# EAGLE schematic Precision Charlieplex (EAGLE 5.11)
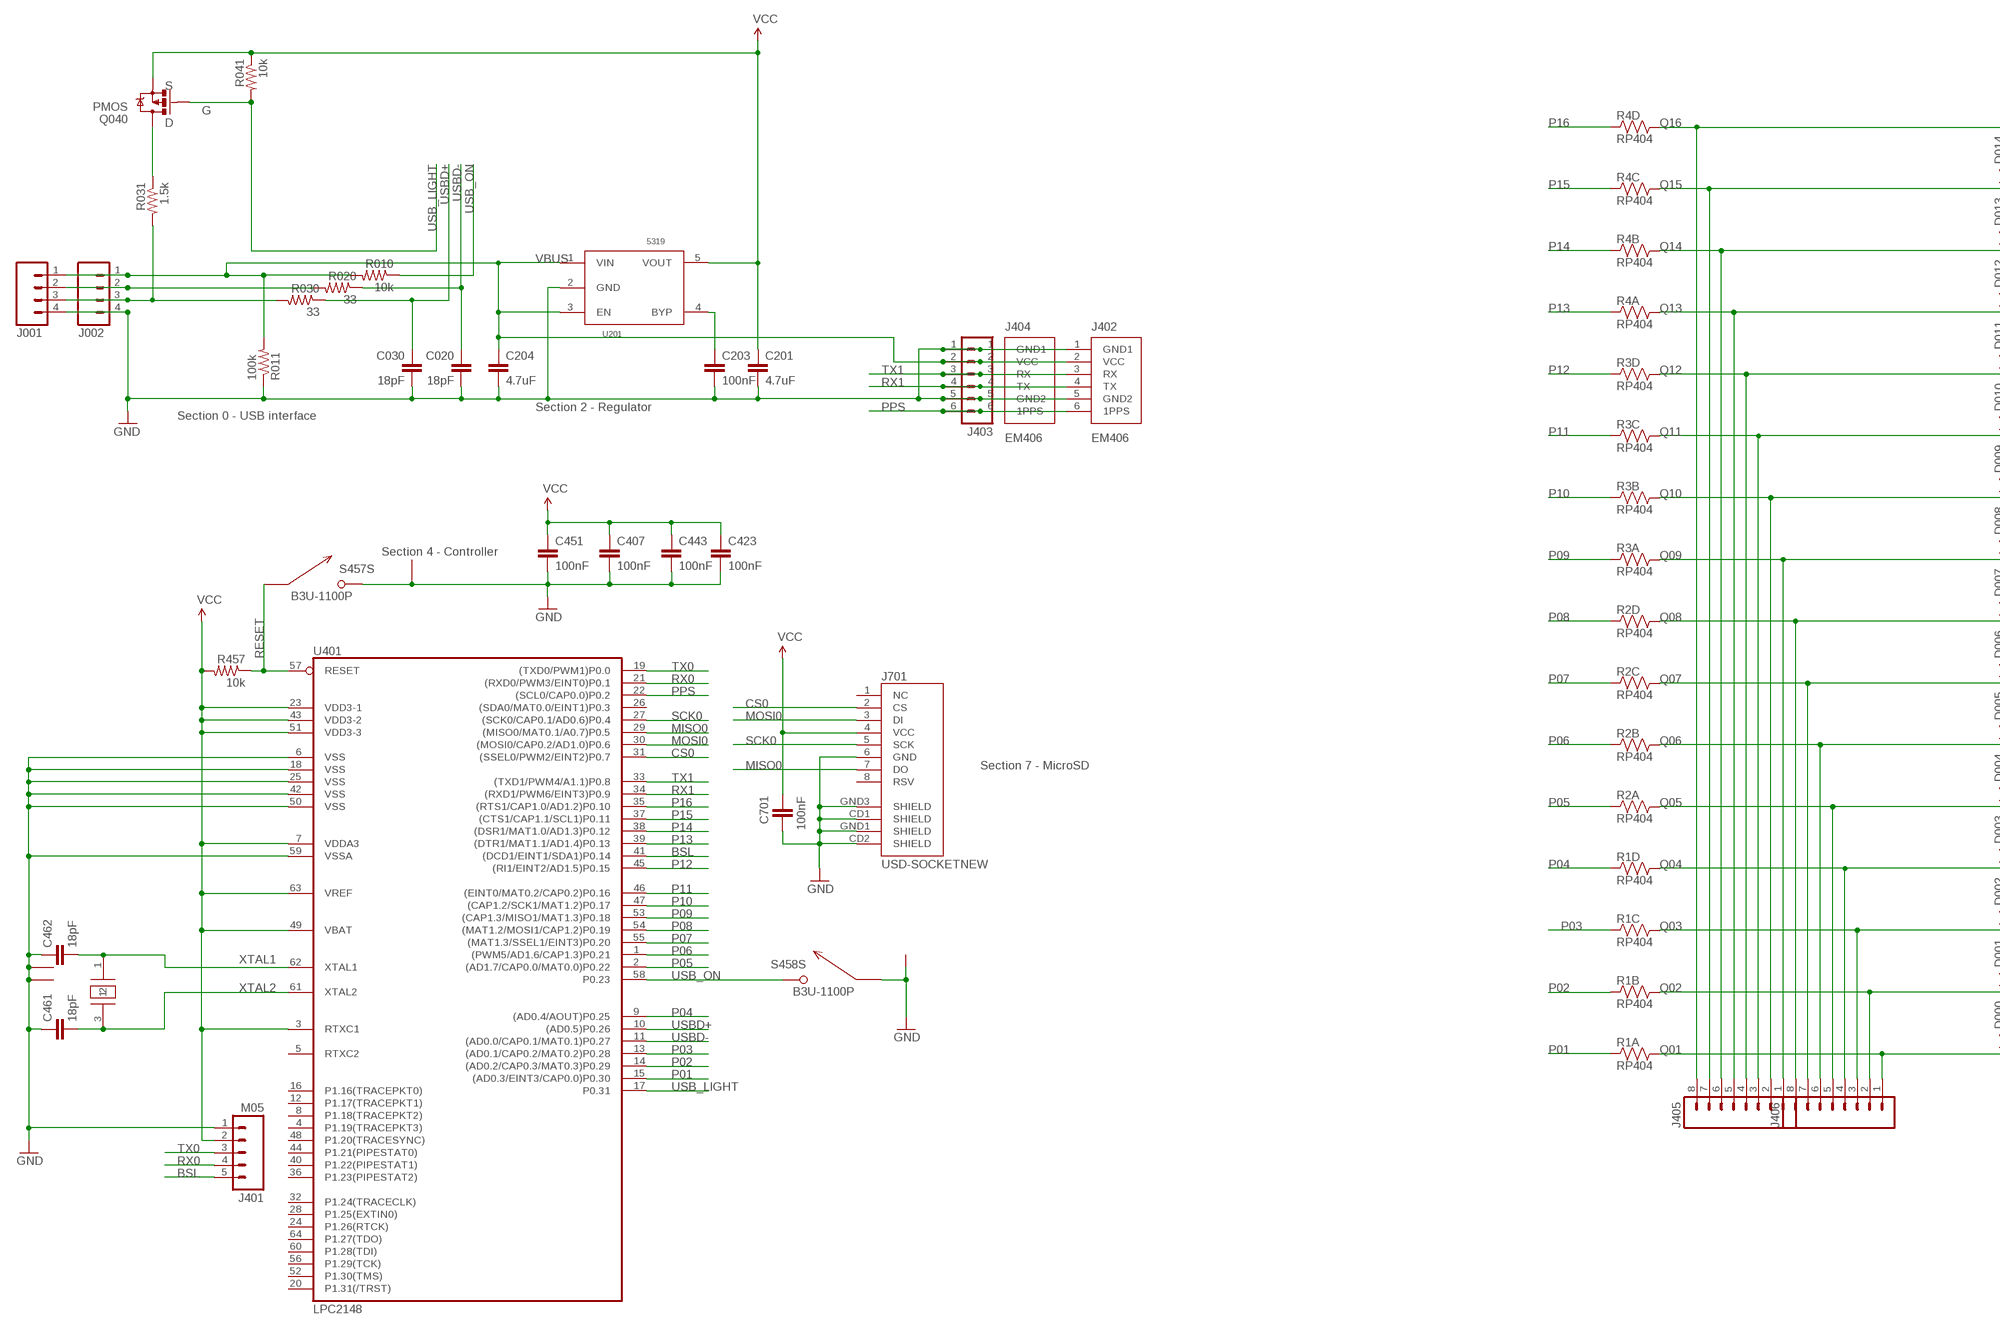
[diagram p0: schematic, sheet 1, part 1 of 2]
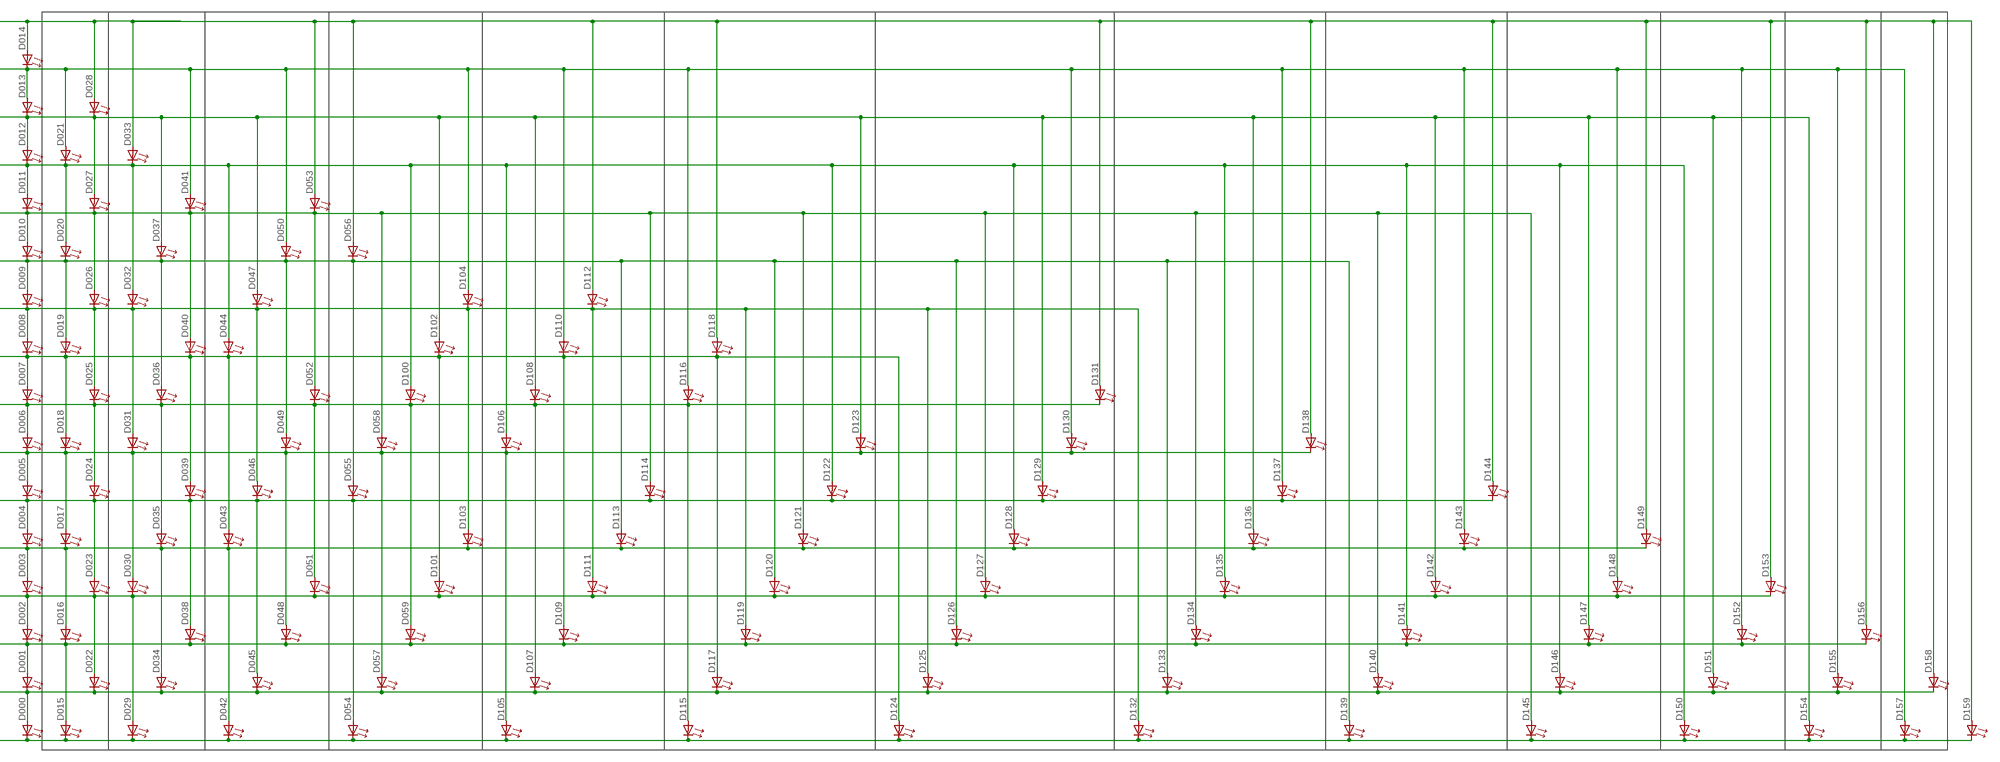
[diagram p1: schematic, sheet 1, part 2 of 2]

## Parts
C020  18pF  CAP0402-CAP  [0402-CAP]
C030  18pF  CAP0402-CAP  [0402-CAP]
C201  4.7uF  CAP0402-CAP  [0402-CAP]
C203  100nF  CAP0402-CAP  [0402-CAP]
C204  4.7uF  CAP0402-CAP  [0402-CAP]
C407  100nF  CAP0402-CAP  [0402-CAP]
C423  100nF  CAP0402-CAP  [0402-CAP]
C443  100nF  CAP0402-CAP  [0402-CAP]
C451  100nF  CAP0402-CAP  [0402-CAP]
C461  18pF  CAP0402-CAP  [0402-CAP]
C462  18pF  CAP0402-CAP  [0402-CAP]
C701  100nF  CAP0402-CAP  [0402-CAP]
D000  HOUR  LED0603_SIDE  [LED0603_SIDE]
D001  HOUR  LED0603_SIDE  [LED0603_SIDE]
D002  HOUR  LED0603_SIDE  [LED0603_SIDE]
D003  HOUR  LED0603_SIDE  [LED0603_SIDE]
D004  HOUR  LED0603_SIDE  [LED0603_SIDE]
D005  HOUR  LED0603_SIDE  [LED0603_SIDE]
D006  HOUR  LED0603_SIDE  [LED0603_SIDE]
D007  HOUR  LED0603_SIDE  [LED0603_SIDE]
D008  HOUR  LED0603_SIDE  [LED0603_SIDE]
D009  HOUR  LED0603_SIDE  [LED0603_SIDE]
D010  HOUR  LED0603_SIDE  [LED0603_SIDE]
D011  HOUR  LED0603_SIDE  [LED0603_SIDE]
D012  HOUR  LED0603_SIDE  [LED0603_SIDE]
D013  HOUR  LED0603_SIDE  [LED0603_SIDE]
D014  HOUR  LED0603_SIDE  [LED0603_SIDE]
D015  HOUR  LED0603_SIDE  [LED0603_SIDE]
D016  HOUR  LED0603_SIDE  [LED0603_SIDE]
D017  HOUR  LED0603_SIDE  [LED0603_SIDE]
D018  HOUR  LED0603_SIDE  [LED0603_SIDE]
D019  HOUR  LED0603_SIDE  [LED0603_SIDE]
D020  HOUR  LED0603_SIDE  [LED0603_SIDE]
D021  HOUR  LED0603_SIDE  [LED0603_SIDE]
D022  HOUR  LED0603_SIDE  [LED0603_SIDE]
D023  HOUR  LED0603_SIDE  [LED0603_SIDE]
D024  HOUR  LED0603_SIDE  [LED0603_SIDE]
D025  HOUR  LED0603_SIDE  [LED0603_SIDE]
D026  HOUR  LED0603_SIDE  [LED0603_SIDE]
D027  HOUR  LED0603_SIDE  [LED0603_SIDE]
D028  HOUR  LED0603_SIDE  [LED0603_SIDE]
D029  HOUR  LED0603_SIDE  [LED0603_SIDE]
D030  HOUR  LED0603_SIDE  [LED0603_SIDE]
D031  HOUR  LED0603_SIDE  [LED0603_SIDE]
D032  HOUR  LED0603_SIDE  [LED0603_SIDE]
D033  HOUR  LED0603_SIDE  [LED0603_SIDE]
D034  HOUR  LED0603_SIDE  [LED0603_SIDE]
D035  HOUR  LED0603_SIDE  [LED0603_SIDE]
D036  HOUR  LED0603_SIDE  [LED0603_SIDE]
D037  HOUR  LED0603_SIDE  [LED0603_SIDE]
D038  HOUR  LED0603_SIDE  [LED0603_SIDE]
D039  HOUR  LED0603_SIDE  [LED0603_SIDE]
D040  HOUR  LED0603_SIDE  [LED0603_SIDE]
D041  HOUR  LED0603_SIDE  [LED0603_SIDE]
D042  HOUR  LED0603_SIDE  [LED0603_SIDE]
D043  HOUR  LED0603_SIDE  [LED0603_SIDE]
D044  HOUR  LED0603_SIDE  [LED0603_SIDE]
D045  HOUR  LED0603_SIDE  [LED0603_SIDE]
D046  HOUR  LED0603_SIDE  [LED0603_SIDE]
D047  HOUR  LED0603_SIDE  [LED0603_SIDE]
D048  HOUR  LED0603_SIDE  [LED0603_SIDE]
D049  HOUR  LED0603_SIDE  [LED0603_SIDE]
D050  HOUR  LED0603_SIDE  [LED0603_SIDE]
D051  HOUR  LED0603_SIDE  [LED0603_SIDE]
D052  HOUR  LED0603_SIDE  [LED0603_SIDE]
D053  HOUR  LED0603_SIDE  [LED0603_SIDE]
D054  HOUR  LED0603_SIDE  [LED0603_SIDE]
D055  HOUR  LED0603_SIDE  [LED0603_SIDE]
D056  HOUR  LED0603_SIDE  [LED0603_SIDE]
D057  HOUR  LED0603_SIDE  [LED0603_SIDE]
D058  HOUR  LED0603_SIDE  [LED0603_SIDE]
D059  HOUR  LED0603_SIDE  [LED0603_SIDE]
D100  HOUR  LED0603_SIDE  [LED0603_SIDE]
D101  HOUR  LED0603_SIDE  [LED0603_SIDE]
D102  HOUR  LED0603_SIDE  [LED0603_SIDE]
D103  HOUR  LED0603_SIDE  [LED0603_SIDE]
D104  HOUR  LED0603_SIDE  [LED0603_SIDE]
D105  HOUR  LED0603_SIDE  [LED0603_SIDE]
D106  HOUR  LED0603_SIDE  [LED0603_SIDE]
D107  HOUR  LED0603_SIDE  [LED0603_SIDE]
D108  HOUR  LED0603_SIDE  [LED0603_SIDE]
D109  HOUR  LED0603_SIDE  [LED0603_SIDE]
D110  HOUR  LED0603_SIDE  [LED0603_SIDE]
D111  HOUR  LED0603_SIDE  [LED0603_SIDE]
D112  HOUR  LED0603_SIDE  [LED0603_SIDE]
D113  HOUR  LED0603_SIDE  [LED0603_SIDE]
D114  HOUR  LED0603_SIDE  [LED0603_SIDE]
D115  HOUR  LED0603_SIDE  [LED0603_SIDE]
D116  HOUR  LED0603_SIDE  [LED0603_SIDE]
D117  HOUR  LED0603_SIDE  [LED0603_SIDE]
D118  HOUR  LED0603_SIDE  [LED0603_SIDE]
D119  HOUR  LED0603_SIDE  [LED0603_SIDE]
D120  HOUR  LED0603_SIDE  [LED0603_SIDE]
D121  HOUR  LED0603_SIDE  [LED0603_SIDE]
D122  HOUR  LED0603_SIDE  [LED0603_SIDE]
D123  HOUR  LED0603_SIDE  [LED0603_SIDE]
D124  HOUR  LED0603_SIDE  [LED0603_SIDE]
D125  HOUR  LED0603_SIDE  [LED0603_SIDE]
D126  HOUR  LED0603_SIDE  [LED0603_SIDE]
D127  HOUR  LED0603_SIDE  [LED0603_SIDE]
D128  HOUR  LED0603_SIDE  [LED0603_SIDE]
D129  HOUR  LED0603_SIDE  [LED0603_SIDE]
D130  HOUR  LED0603_SIDE  [LED0603_SIDE]
D131  HOUR  LED0603_SIDE  [LED0603_SIDE]
D132  HOUR  LED0603_SIDE  [LED0603_SIDE]
D133  HOUR  LED0603_SIDE  [LED0603_SIDE]
D134  HOUR  LED0603_SIDE  [LED0603_SIDE]
D135  HOUR  LED0603_SIDE  [LED0603_SIDE]
D136  HOUR  LED0603_SIDE  [LED0603_SIDE]
D137  HOUR  LED0603_SIDE  [LED0603_SIDE]
D138  HOUR  LED0603_SIDE  [LED0603_SIDE]
D139  HOUR  LED0603_SIDE  [LED0603_SIDE]
D140  HOUR  LED0603_SIDE  [LED0603_SIDE]
D141  HOUR  LED0603_SIDE  [LED0603_SIDE]
D142  HOUR  LED0603_SIDE  [LED0603_SIDE]
D143  HOUR  LED0603_SIDE  [LED0603_SIDE]
D144  HOUR  LED0603_SIDE  [LED0603_SIDE]
D145  HOUR  LED0603_SIDE  [LED0603_SIDE]
D146  HOUR  LED0603_SIDE  [LED0603_SIDE]
D147  HOUR  LED0603_SIDE  [LED0603_SIDE]
D148  HOUR  LED0603_SIDE  [LED0603_SIDE]
D149  HOUR  LED0603_SIDE  [LED0603_SIDE]
D150  HOUR  LED0603_SIDE  [LED0603_SIDE]
D151  HOUR  LED0603_SIDE  [LED0603_SIDE]
D152  HOUR  LED0603_SIDE  [LED0603_SIDE]
D153  HOUR  LED0603_SIDE  [LED0603_SIDE]
D154  HOUR  LED0603_SIDE  [LED0603_SIDE]
D155  HOUR  LED0603_SIDE  [LED0603_SIDE]
D156  HOUR  LED0603_SIDE  [LED0603_SIDE]
D157  HOUR  LED0603_SIDE  [LED0603_SIDE]
D158  HOUR  LED0603_SIDE  [LED0603_SIDE]
D159  HOUR  LED0603_SIDE  [LED0603_SIDE]
J001  M04PTH  [1X04]
J002  M04PTH  [1X04]
J401  M05  M05PTH  [1X05]
J402  EM406  [EM406]
J403  M06SIP  [1X06]
J404  EM406  [EM406]
J405  M081X08  [1X08]
J406  M081X08  [1X08]
J701  USD-SOCKETNEW  [MICRO-SD-SOCKET-PP]
Q040  PMOS  MOSFET-PCHANNELSMD  [SOT23-3]
R1  RP404  [CRA04]
R2  RP404  [CRA04]
R3  RP404  [CRA04]
R4  RP404  [CRA04]
R010  10k  RESISTOR0402-RES  [0402-RES]
R011  100k  RESISTOR0402-RES  [0402-RES]
R020  33  RESISTOR0402-RES  [0402-RES]
R030  33  RESISTOR0402-RES  [0402-RES]
R031  1.5k  RESISTOR0402-RES  [0402-RES]
R041  10k  RESISTOR0402-RES  [0402-RES]
R457  10k  RESISTOR0402-RES  [0402-RES]
S457  B3U-1100P  [B3U-1100P]
S458  B3U-1100P  [B3U-1100P]
U201  5319  MIC5319D5  [SOT-23-5]
U401  LPC2148  LPC213X  [SQFP-S-10X10-64]
Y401  12.00  TSX-3225  [CRYSTAL_SMD]

## Nets
BSL: J401.5 U401.41((DCD1/EINT1/SDA1)P0.14)
CONN_D+: J001.3 J002.3 R030.2 R031.2
CONN_D-: J001.2 J002.2 R020.2
CS0: J701.2(CS) U401.31((SSEL0/PWM2/EINT2)P0.7)
GND [power]: C020.2 C030.2 C201.2 C203.2 C204.2 C407.2 C423.2 C443.2 C451.2 C461.1 C462.1 C701.2 J001.4 J002.4 J401.1 J402.1(GND1) J402.5(GND2) J403.1 J403.5 J404.1(GND1) J404.5(GND2) J701.6(GND) J701.CD1(SHIELD) J701.CD2(SHIELD) J701.GND1(SHIELD) J701.GND3(SHIELD) R011.1 S457.P$2 S457.P$3 S458.P$1 S458.P$3 U201.2(GND) U401.6(VSS) U401.18(VSS) U401.25(VSS) U401.42(VSS) U401.50(VSS) U401.59(VSSA) Y401.2 Y401.4
MISO0: J701.7(DO) U401.29((MISO0/MAT0.1/A0.7)P0.5)
MOSI0: J701.3(DI) U401.30((MOSI0/CAP0.2/AD1.0)P0.6)
N$36: C203.1 U201.4(BYP)
N$37: Q040.3(D) R031.1
P01: R1.1 U401.15((AD0.3/EINT3/CAP0.0)P0.30)
P02: R1.2 U401.14((AD0.2/CAP0.3/MAT0.3)P0.29)
P03: R1.3 U401.13((AD0.1/CAP0.2/MAT0.2)P0.28)
P04: R1.4 U401.9((AD0.4/AOUT)P0.25)
P05: R2.1 U401.2((AD1.7/CAP0.0/MAT0.0)P0.22)
P06: R2.2 U401.1((PWM5/AD1.6/CAP1.3)P0.21)
P07: R2.3 U401.55((MAT1.3/SSEL1/EINT3)P0.20)
P08: R2.4 U401.54((MAT1.2/MOSI1/CAP1.2)P0.19)
P09: R3.1 U401.53((CAP1.3/MISO1/MAT1.3)P0.18)
P10: R3.2 U401.47((CAP1.2/SCK1/MAT1.2)P0.17)
P11: R3.3 U401.46((EINT0/MAT0.2/CAP0.2)P0.16)
P12: R3.4 U401.45((RI1/EINT2/AD1.5)P0.15)
P13: R4.1 U401.39((DTR1/MAT1.1/AD1.4)P0.13)
P14: R4.2 U401.38((DSR1/MAT1.0/AD1.3)P0.12)
P15: R4.3 U401.37((CTS1/CAP1.1/SCL1)P0.11)
P16: R4.4 U401.35((RTS1/CAP1.0/AD1.2)P0.10)
PPS: J402.6(1PPS) J403.6 J404.6(1PPS) U401.22((SCL0/CAP0.0)P0.2)
Q01: D000.C D015.C D029.C D042.C D054.C D105.C D115.C D124.C D132.C D139.C D145.C D150.C D154.C D157.C D159.C J406.1 R1.8
Q02: D000.A D001.C D022.C D034.C D045.C D057.C D107.C D117.C D125.C D133.C D140.C D146.C D151.C D155.C D158.C J406.2 R1.7
Q03: D001.A D002.C D015.A D016.C D038.C D048.C D059.C D109.C D119.C D126.C D134.C D141.C D147.C D152.C D156.C J406.3 R1.6
Q04: D002.A D003.C D022.A D023.C D029.A D030.C D051.C D101.C D111.C D120.C D127.C D135.C D142.C D148.C D153.C J406.4 R1.5
Q05: D003.A D004.C D016.A D017.C D034.A D035.C D042.A D043.C D103.C D113.C D121.C D128.C D136.C D143.C D149.C J406.5 R2.8
Q06: D004.A D005.C D023.A D024.C D038.A D039.C D045.A D046.C D054.A D055.C D114.C D122.C D129.C D137.C D144.C J406.6 R2.7
Q07: D005.A D006.C D017.A D018.C D030.A D031.C D048.A D049.C D057.A D058.C D105.A D106.C D123.C D130.C D138.C J406.7 R2.6
Q08: D006.A D007.C D024.A D025.C D035.A D036.C D051.A D052.C D059.A D100.C D107.A D108.C D115.A D116.C D131.C J406.8 R2.5
Q09: D007.A D008.C D018.A D019.C D039.A D040.C D043.A D044.C D101.A D102.C D109.A D110.C D117.A D118.C D124.A J405.1 R3.8
Q10: D008.A D009.C D025.A D026.C D031.A D032.C D046.A D047.C D103.A D104.C D111.A D112.C D119.A D125.A D132.A J405.2 R3.7
Q11: D009.A D010.C D019.A D020.C D036.A D037.C D049.A D050.C D055.A D056.C D113.A D120.A D126.A D133.A D139.A J405.3 R3.6
Q12: D010.A D011.C D026.A D027.C D040.A D041.C D052.A D053.C D058.A D114.A D121.A D127.A D134.A D140.A D145.A J405.4 R3.5
Q13: D011.A D012.C D020.A D021.C D032.A D033.C D044.A D100.A D106.A D122.A D128.A D135.A D141.A D146.A D150.A J405.5 R4.8
Q14: D012.A D013.C D027.A D028.C D037.A D047.A D102.A D108.A D123.A D129.A D136.A D142.A D147.A D151.A D154.A J405.6 R4.7
Q15: D013.A D014.C D021.A D041.A D050.A D104.A D110.A D116.A D130.A D137.A D143.A D148.A D152.A D155.A D157.A J405.7 R4.6
Q16: D014.A D028.A D033.A D053.A D056.A D112.A D118.A D131.A D138.A D144.A D149.A D153.A D156.A D158.A D159.A J405.8 R4.5
RESET: R457.1 S457.P$1 U401.57(RESET)
RX0: J401.4 U401.21((RXD0/PWM3/EINT0)P0.1)
RX1: J402.4(TX) J403.4 J404.4(TX) U401.34((RXD1/PWM6/EINT3)P0.9)
SCK0: J701.5(SCK) U401.27((SCK0/CAP0.1/AD0.6)P0.4)
TX0: J401.3 U401.19((TXD0/PWM1)P0.0)
TX1: J402.3(RX) J403.3 J404.3(RX) U401.33((TXD1/PWM4/A1.1)P0.8)
USB_LIGHT: Q040.1(G) R041.2 U401.17(P0.31)
USB_ON: R010.1 S458.P$2 U401.58(P0.23)
USBD+: C030.1 R030.1 U401.10((AD0.5)P0.26)
USBD-: C020.1 R020.1 U401.11((AD0.0/CAP0.1/MAT0.1)P0.27)
VBUS: C204.1 J001.1 J002.1 J402.2(VCC) J403.2 J404.2(VCC) R010.2 R011.2 U201.1(VIN) U201.3(EN)
VCC [power]: C201.1 C407.1 C423.1 C443.1 C451.1 C701.1 J401.2 J701.4(VCC) Q040.2(S) R041.1 R457.2 U201.5(VOUT) U401.3(RTXC1) U401.7(VDDA3) U401.23(VDD3-1) U401.43(VDD3-2) U401.49(VBAT) U401.51(VDD3-3) U401.63(VREF)
XTAL1: C462.2 U401.62(XTAL1) Y401.1
XTAL2: C461.2 U401.61(XTAL2) Y401.3
Unconnected: J701.1(NC) J701.8(RSV) U401.4(P1.19(TRACEPKT3)) U401.5(RTXC2) U401.8(P1.18(TRACEPKT2)) U401.12(P1.17(TRACEPKT1)) U401.16(P1.16(TRACEPKT0)) U401.20(P1.31(/TRST)) U401.24(P1.26(RTCK)) U401.26((SDA0/MAT0.0/EINT1)P0.3) U401.28(P1.25(EXTIN0)) U401.32(P1.24(TRACECLK)) U401.36(P1.23(PIPESTAT2)) U401.40(P1.22(PIPESTAT1)) U401.44(P1.21(PIPESTAT0)) U401.48(P1.20(TRACESYNC)) U401.52(P1.30(TMS)) U401.56(P1.29(TCK)) U401.60(P1.28(TDI)) U401.64(P1.27(TDO))

## Notes on the sheet
- S
- G
- D
- Section 0 - USB interface | Section 2 - Regulator
- Section 4 - Controller
- Section 7 - MicroSD

## Library data of the parts
C020 C030 C201 C203 C204 C407 C423 C443 C451 C461 C462 C701 = SparkFun:CAP: Capacitor
D000 D001-D009 D010-D059 D100-D159 = KwanSystems:LED0603_SIDE
J001 J002 = SparkFun:M04: Header 4 Standard 4-pin 0.1" header. Use with straight break away headers (SKU : PRT-00116), right angle break away headers (PRT-00553), swiss pins (PRT-00743), machine pins (PRT-00117), and female headers (PRT-00115). Molex polarized connector foot print use with SKU : PRT-08231 with associated ...
J401 = SparkFun:M05: Header 5 Standard 5-pin 0.1" header. Use with straight break away headers (SKU : PRT-00116), right angle break away headers (PRT-00553), swiss pins (PRT-00743), machine pins (PRT-00117), and female headers (PRT-00115). Molex polarized connector foot print use with SKU : PRT-08230 with associated ...
J402 J404 = SparkFun:EM406: EM406 Connector Proven layout and schematic for EM406 connector. Spark Fun Electronics SKU : GPS-00579
J403 = SparkFun:M06: Header 6 Standard 6-pin 0.1" header. Use with straight break away headers (SKU : PRT-00116), right angle break away headers (PRT-00553), swiss pins (PRT-00743), machine pins (PRT-00117), and female headers (PRT-00115). Molex polarized connector foot print use with SKU : PRT-08094 with associated ...
J405 J406 = SparkFun:M08: Header 8 Standard 8-pin 0.1" header. Use with straight break away headers (SKU : PRT-00116), right angle break away headers (PRT-00553), swiss pins (PRT-00743), machine pins (PRT-00117), and female headers (PRT-00115).
J701 = SparkFun:USD-SOCKET: microSD Socket Push-push type uSD socket. Schematic element and footprint production proven. Spark Fun Electronics SKU : PRT-00127. tDoc lines correctly indicate media card edge positions when inserting (unlocked, locked, depressed).
Q040 = SparkFun:MOSFET-PCHANNEL
R1-R4 = KwanSystems:RP4
R010 R011 R020 R030 R031 R041 R457 = SparkFun:RESISTOR: Resistor
S457 S458 = KwanSystems:B3U-1100P
U201 = KwanSystems:MIC5319
U401 = SparkFun:LPC213X: LPC213x Schematic element and footprint for NXP LPC213x. Spark Fun Electronics SKU : COM-00520
Y401 = KwanSystems:TSX-3225

## Net classes
0 default: width 0.152 mm, drill 0.33 mm, clearance 0.152 mm
1 power: width 0.152 mm, drill 0.33 mm, clearance 0.152 mm to class 0, clearance 0.152 mm